# Altium PCB FlightController_Top_6x6.PcbDoc (part 4 of 6)
Units mm, origin at the board's own origin, x right, y up, seen from the top; angles counter-clockwise.
Board outline 149.8 x 149.8 mm, 2 copper layers (Top Layer, Bottom Layer); 156 components, 166 nets, 860 pads, 423 vias.
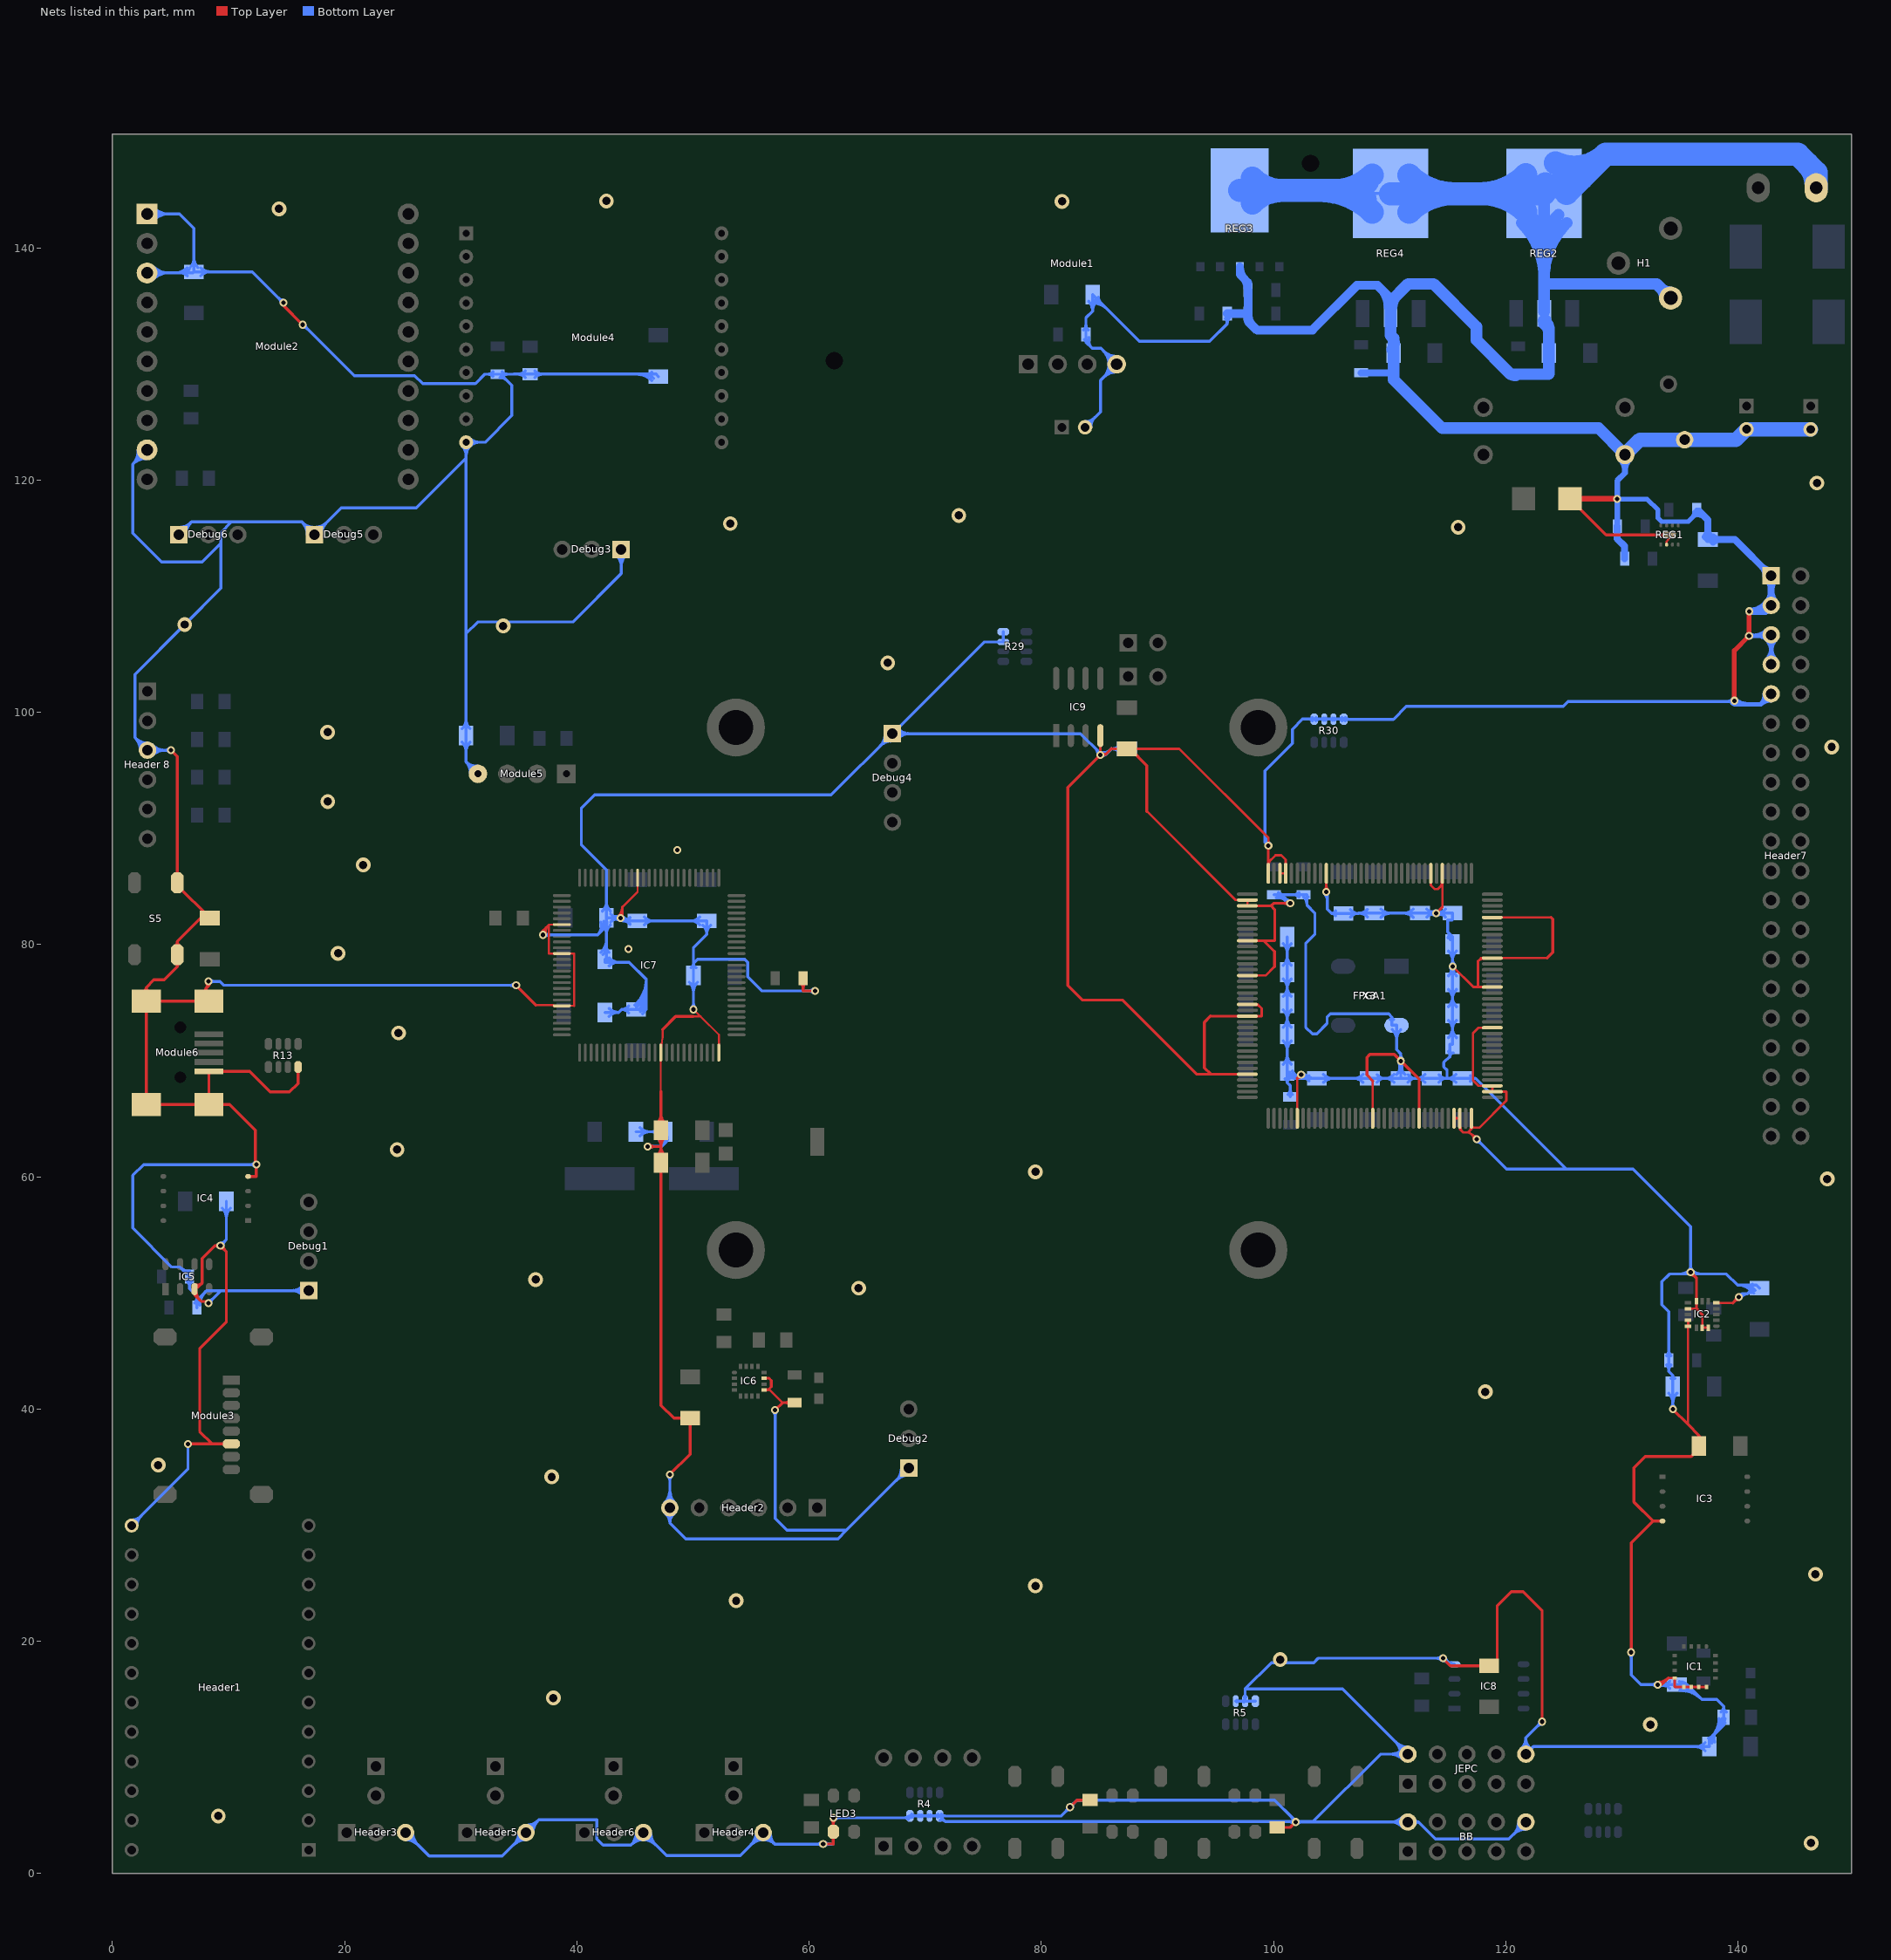
[diagram p4: the nets of this part, all layers, seen from the top]

## Via types
v1: diameter 0.686, hole 0.381, Top Layer to Bottom Layer, 391 vias
v2: diameter 1.27, hole 0.711, Top Layer to Bottom Layer, 32 vias

## Nets (pads, with @x,y where several pads share a name; then routed paths per layer and width w, separated by ;. In a path a pad name is that pad's centre, name@x,y a point inside that pad or via, vN(x,y) a via of type N, cw(c..) or ccw(c..) an arc to the next point about the centre after c; other vN are vias at no path point) (continued)
GND: "Header 8.3" BB.2 BB.10 C2.1 C3.2 C4.2 C5.1 C7.2 C8.2 C9.1 C10.2 C11.2 C12.2 C13.2 C14.2 C15.1 C16.2 C17.2 C18.2 C19.1 C20.2 C21.2 C23.1 C24.2 C25.2 C26.2 C27.2 C28.2 C29.2 C30.2 C31.2 C32.1 C33.1 C34.1 C35.1 C36.2 C37.2 C38.1 C39.2 C40.1 C41.2 C42.2 C43.2 C44.2 C45.2 C46.2 C47.2 C48.2 C49.1 C56.2 C57.2 C58.2 C59.2 C60.2 C61.2 C62.2 C63.2 C64.2 C65.2 C66.2 C67.2 C68.2 C69.2 C70.2 C71.2 C72.2 C73.2 C74.2 C75.2 C76.2 C77.2 C78.1 C79.1 D2.A Debug1.1 Debug2.1 Debug3.1 Debug4.1 Debug5.1 Debug6.1 FPGA1.6 FPGA1.19 FPGA1.27 FPGA1.33 FPGA1.34 FPGA1.36 FPGA1.38 FPGA1.39 FPGA1.49 FPGA1.56 FPGA1.61 FPGA1.68 FPGA1.78 FPGA1.80 FPGA1.98 FPGA1.105 FPGA1.106 FPGA1.108 FPGA1.110 FPGA1.111 FPGA1.117 FPGA1.123 FPGA1.128 FPGA1.130 FPGA1.140 H1.OUT Header1.13 Header2.6 Header3.3 Header4.3 Header5.3 Header6.3 Header7.1 Header7.3 Header7.5 Header7.7 Header7.9 Header9.R IC1.8 IC1.9 IC1.10 IC1.11 IC1.12 IC2.5 IC2.8 IC2.10 IC2.12 IC2.13 IC2.15 IC2.16 IC3.4 IC4.4 IC5.3 IC6.9 IC6.11 IC7.15 IC7.31 IC7.36 IC7.45 IC7.65 IC7.75 IC8.4 IC9.4 JEPC.2 JEPC.10 LED3.1 Module1.4 Module2.1 Module2.3 Module2.9 Module3.6 Module4.10 Module5.4 Module6.1 R3.2 R4.5 R4.6 R4.7 R4.8 R5.6 R5.7 R5.8 R6.2 R7.2 R13.8 R20.1 R29.3 R29.4 R30.5 R30.6 R30.7 R30.8 REG1.2 REG2.2 REG3.3 REG4.2 S5.1 X3.2 | length 2084.7
  Top Layer w0.165: REG1.2@133.862,114.453 133.862,114.727
  Top Layer w0.17: 36.47,74.797 37.969,74.797 38.035,74.731 IC7.45@38.704,74.731 39.772,74.731 ; 37.587,79.232 IC7.36@38.704,79.232 39.772,79.232 ; 37.587,81.731 IC7.31@38.704,81.731 ; 37.799,74.797 cw(c37.799,74.476) IC7.45@38.026,74.703 ; 45.229,84.552 IC7.15@45.229,85.756 ; IC7.65@47.204,71.388 ccw(c46.985,71.665) 47.336,71.624 ; 47.229,67.35 IC7.65@47.229,70.707 47.379,71.992 ; IC7.75@52.229,70.707 52.229,72.233 ; 133.862,114.727 133.985,114.85 REG1.2@133.985,115.062 ; 133.985,114.832 cw(c134.232,114.832) REG1.2@134.168,115.07
  Top Layer w0.175: v1@36.988,80.825 cw(c37.469,80.92) 37.122,81.266 ; 37.081,81.225 37.587,81.731 ; v1@37.16,80.859 cw(c37.858,80.995) 37.355,81.499 ; v1@37.331,80.893 cw(c38.247,81.071) 37.587,81.731 ; 37.587,79.232 37.587,81.731 ; 39.772,74.731 39.772,79.232 ; 43.912,83.235 45.229,84.552 ; 47.379,71.992 47.379,72.689 ; 50.042,73.809 50.654,73.809 ; v1(50.042,74.42) 50.654,73.809 ; 52.229,72.233 50.654,73.809
  Top Layer w0.2: FPGA1.111@97.752,83.344 FPGA1.110@97.752,83.844 ; FPGA1.106@100.552,86.144 FPGA1.105@101.052,86.144 ; FPGA1.33@115.552,65.044 FPGA1.34@116.052,65.044 ; FPGA1.38@118.852,67.344 FPGA1.39@118.852,67.844 ; IC1.9@135.337,16.058 IC1.10@135.987,16.058 IC1.11@136.637,16.058 IC1.12@137.287,16.058 ; IC2.13@135.719,47.144 IC2.12@135.719,47.644 ; IC2.15@136.936,47.01 IC2.16@137.436,47.01
  Top Layer w0.21: IC6.11@56.114,42.65 56.553,42.65 56.739,42.464 ; 56.739,41.905 56.545,41.712 ; C20.2@58.362,40.344 ccw(c57.859,39.841) 57.859,40.553 ccw(c57.859,41.265) C20.2@58.362,40.762 ; C20.2@58.771,40.553 57.704,40.553 56.545,41.712 ; 89.099,91.486 96.741,83.844 FPGA1.110@97.752,83.844 ; 91.89,96.864 99.563,89.19 v1(99.563,88.514) ; 93.376,68.844 94.596,68.844 FPGA1.140@97.752,68.844 ; 94.585,73.844 FPGA1.130@97.752,73.844 98.979,73.844 98.979,74.519 98.654,74.844 FPGA1.128@97.752,74.844 ; FPGA1.123@97.752,77.344 99.335,77.344 100.097,78.106 ; FPGA1.117@97.752,80.344 99.157,80.344 ; FPGA1.111@97.752,83.344 99.792,83.344 ; FPGA1.128@98.502,74.799 cw(c98.502,74.323) 98.839,74.659 ; FPGA1.108@99.552,86.144 99.552,87.081 ; v1@99.552,88.503 99.552,87.081 ; FPGA1.108@99.597,86.894 cw(c100.156,86.894) 99.761,87.289 ; 100.097,79.404 99.157,80.344 ; 100.097,80.344 99.157,80.344 ; FPGA1.105@101.052,86.144 101.052,87.331 100.681,87.702 100.173,87.702 99.552,87.081 ; FPGA1.6@102.052,65.044 102.052,68.474 ; v1@104.384,84.707 ccw(c103.977,85.114) 104.552,85.114 ccw(c105.127,85.114) v1@104.72,84.707 ; v1(104.552,84.539) FPGA1.98@104.552,86.144 ; FPGA1.19@108.552,65.044 108.552,68.271 ; FPGA1.27@112.552,65.044 112.552,68.399 ; FPGA1.80@113.552,86.144 113.552,85.118 113.889,84.781 114.146,84.781 114.552,85.187 ; v1(114.016,82.709) 114.552,83.245 114.552,85.187 ; 114.329,84.964 ccw(c113.899,85.394) FPGA1.78@114.507,85.394 ; FPGA1.78@114.552,86.144 114.552,85.187 ; v1(115.438,78.126) 117.22,76.344 117.623,76.344 ; FPGA1.34@116.052,65.044 116.052,64.105 116.331,63.826 116.773,63.826 ; FPGA1.34@116.097,64.294 ccw(c116.662,64.294) 116.262,63.895 ; 116.842,63.895 ccw(c116.442,64.294) FPGA1.36@117.007,64.294 ; FPGA1.36@117.052,65.044 FPGA1.36@117.052,64.232 ; FPGA1.36@117.084,64.326 ccw(c117.31,64.552) 117.31,64.232 ; v1@117.253,63.246 ccw(c116.679,63.246) 117.085,63.652 ccw(c117.491,64.059) v1@117.491,63.484 ; v1(117.491,63.246) 117.064,63.673 116.773,63.826 ; 117.653,78.613 cw(c118.102,78.164) FPGA1.61@118.102,78.799 ; FPGA1.38@118.852,67.344 120.061,67.344 120.061,66.569 117.724,64.232 FPGA1.36@117.052,64.232 ; FPGA1.39@118.852,67.844 117.648,67.844 117.189,68.304 117.189,72.384 117.648,72.844 FPGA1.49@118.852,72.844 ; FPGA1.56@118.852,76.344 117.623,76.344 ; FPGA1.68@118.852,82.344 123.915,82.344 ; 123.579,78.844 FPGA1.61@118.852,78.844 117.884,78.844 117.623,78.583 117.623,76.344 ; 134.003,16.833 IC1.8@134.562,16.833 134.562,16.058 IC1.9@135.337,16.058 ; 135.708,38.68 135.708,47.144 IC2.13@135.719,47.144 ; IC2.10@135.719,48.644 136.436,48.644 ; 136.436,48.636 136.436,48.644 ; 136.436,51.278 IC2.8@136.436,49.278 136.436,48.644 ; IC2.15@136.936,47.01 136.936,48.136 ; IC2.5@138.153,49.144 139.568,49.144 ; 56.545,41.712 IC6.9@56.114,41.65 56.484,41.65 56.545,41.712 ; 116.773,63.826 117.052,64.105 FPGA1.36@117.052,64.232
  Top Layer w0.254: Module6.1@2.654,75.974 ccw(c2.553,76.311) 2.905,76.311 ; Module6.1@3.156,75.974 cw(c3.257,76.311) 2.905,76.311 ; v1(5.05,96.744) 5.588,96.206 S5.1@5.588,85.344 5.588,85.087 C15.1@8.382,82.293 7.617,82.293 5.588,80.264 ; S5.1@5.361,79.851 ccw(c5.099,80.264) 5.588,80.264 ; S5.1@5.397,78.417 cw(c5.238,78.105) 5.588,78.105 ; S5.1@5.779,78.417 ccw(c5.938,78.105) 5.588,78.105 ; S5.1@5.815,79.851 cw(c6.077,80.264) 5.588,80.264 ; v1(6.5,36.998) 8.587,36.998 ; IC5.3@7.035,50.481 ccw(c7.169,50.837) 7.439,50.568 ; IC5.3@7.124,50.718 ccw(c7.322,51.241) 7.717,50.846 ; IC5.3@7.177,50.475 cw(c7.459,50.193) 7.459,50.592 ; IC5.3@7.177,50.685 ccw(c7.4,50.908) 7.4,50.592 ; IC5.3@7.22,50.08 ccw(c8.178,50.08) 7.5,49.403 ; Module6.1@7.862,75.989 ccw(c7.81,76.221) 8.047,76.221 ; v1@8.082,76.706 cw(c7.785,76.483) 8.047,76.221 ; v1@8.134,76.656 cw(c7.981,76.429) 8.255,76.429 ; Module6.1@8.218,69.001 cw(c8.008,68.791) 8.305,68.791 cw(c8.602,68.791) Module6.1@8.392,69.001 ; Module6.1@8.233,75.993 cw(c8.28,76.221) 8.047,76.221 ; 8.255,76.428 ccw(c8.022,76.661) v1@8.285,76.858 ; v1(8.255,49.114) 8.098,49.271 7.632,49.271 7.072,49.831 IC5.3@7.072,50.33 7.072,50.592 7.463,50.592 7.717,50.846 ; v1(8.255,76.835) 8.255,76.429 ; Module6.1@8.305,75.138 Module6.1@8.047,75.138 ; v1@8.376,76.656 ccw(c8.529,76.429) 8.255,76.429 ; v1@9.138,53.927 ccw(c8.809,53.627) 8.809,54.072 ; v1@9.138,54.217 cw(c8.809,54.517) 8.809,54.072 ; v1@9.298,53.856 cw(c9.298,53.335) 9.667,53.703 cw(c10.035,54.072) v1@9.514,54.072 ; Module3.6@10.239,36.998 8.587,36.998 ; IC4.4@11.681,60.041 12.391,60.041 v1(12.391,61.057) ; v1@12.319,61.057 12.319,64.008 10.089,66.238 Module6.1@8.305,66.238 ; v1(14.727,135.301) 14.727,135.047 v1(16.378,133.396) ; R13.8@15.977,69.455 15.977,68.047 15.24,67.31 13.589,67.31 11.811,69.088 Module6.1@8.305,69.088 Module6.1@8.305,66.238 ; v1(34.767,76.5) 36.47,74.797 ; v1@36.97,81.029 ccw(c36.853,81.225) 37.081,81.225 ; v1(37.081,80.844) 37.081,81.225 ; v1@37.191,81.029 cw(c37.309,81.225) 37.081,81.225 ; v1@43.611,82.448 ccw(c42.884,83.175) 43.912,83.175 ; v1(43.764,82.296) 43.912,82.444 43.912,83.235 ; v1(46.101,62.611) 46.106,62.606 47.248,62.606 ; v1@46.254,62.458 cw(c46.611,62.101) 46.611,62.606 ; v1@46.254,62.764 ccw(c46.634,63.144) 46.634,62.606 ; C34.1@46.896,64.585 ccw(c46.046,65.435) 47.248,65.435 ccw(c48.451,65.435) C34.1@47.6,64.585 ; C34.1@46.902,63.425 cw(c46.109,62.607) 47.248,62.607 ; C35.1@46.904,61.798 ccw(c46.128,62.606) 47.248,62.606 ; 47.229,67.35 47.248,67.331 C34.1@47.248,64.007 47.248,62.606 ; 47.379,72.689 48.498,73.809 50.042,73.809 ; C35.1@47.593,61.798 cw(c48.369,62.606) 47.248,62.606 ; C34.1@47.595,63.425 ccw(c48.388,62.607) 47.248,62.607 ; v1(48.006,34.362) 49.754,36.11 C21.2@49.754,39.216 48.357,39.216 47.248,40.325 C35.1@47.248,61.213 47.248,62.606 ; 56.739,41.905 56.739,42.464 ; v1(57.069,39.918) 57.704,40.553 ; C30.2@59.301,76.695 cw(c58.835,76.229) 59.494,76.229 cw(c60.153,76.229) C30.2@59.687,76.695 ; C30.2@59.494,77.089 59.494,76.03 59.482,76.018 v1(60.507,76.018) ; v1(61.214,2.54) 62.087,2.54 62.092,2.535 LED3.1@62.092,3.594 v1(62.092,4.796) ; v1@61.939,4.643 cw(c61.571,4.275) 62.092,4.275 cw(c62.613,4.275) v1@62.245,4.643 ; v1(82.478,5.715) 83.081,6.318 R6.2@84.201,6.318 ; IC9.4@85.09,98.004 v1@85.09,96.393 ; v1@85.243,96.495 ccw(c85.489,96.741) 85.489,96.393 ; v1@85.273,96.227 cw(c85.573,96.039) 85.573,96.393 ; 89.099,91.486 89.099,95.432 C78.1@87.667,96.864 ; 91.89,96.864 C78.1@87.667,96.864 ; 93.376,68.844 86.989,75.23 83.536,75.23 82.291,76.475 82.291,93.544 v1(85.09,96.342) v1@85.09,96.393 ; 94.585,73.844 94.052,73.311 94.052,69.388 94.596,68.844 ; v1@99.552,88.503 v1(99.563,88.514) ; 100.097,78.106 100.097,79.404 ; 100.097,80.344 100.109,80.357 100.109,83.027 99.792,83.344 100.009,83.561 v1(101.443,83.561) ; R7.2@100.33,3.968 101.443,3.968 v1(101.907,4.432) ; v1@101.29,83.409 ccw(c100.922,83.04) 100.922,83.561 ccw(c100.922,84.083) v1@101.29,83.714 ; v1@102.167,68.786 cw(c101.771,68.754) 102.052,68.474 ; v1@102.365,68.589 ccw(c102.332,68.193) 102.052,68.474 ; v1(102.382,68.804) 102.052,68.474 ; 108.552,68.271 108.047,68.776 108.047,70.293 108.301,70.547 110.404,70.547 v1(110.968,69.983) 112.552,68.399 ; v1(114.6,18.537) 115.246,17.891 C64.2@118.564,17.891 119.274,17.891 119.274,23.059 120.493,24.278 121.509,24.278 123.135,22.652 v1(123.135,13.076) ; 123.579,78.844 124.073,79.338 124.073,82.186 123.915,82.344 ; D2.A@125.541,118.394 128.657,115.278 REG1.2@134.112,115.278 ; v1(130.81,19.05) 130.81,28.478 132.685,30.353 ; v1@133.095,16.221 ccw(c133.114,16.889) 133.587,16.416 ; v1(133.096,16.259) 133.429,16.259 134.003,16.833 cw(c133.138,17.699) v1@133.102,16.475 ; IC3.4@133.51,30.353 132.685,30.353 ; REG1.2@133.69,115.156 ccw(c133.394,114.86) 133.394,115.278 ccw(c133.394,115.696) REG1.2@133.69,115.4 ; v1(134.399,39.988) 135.708,38.68 136.652,37.735 ; v1@135.928,51.57 cw(c135.928,51.049) 136.297,51.417 cw(c136.665,51.786) v1@136.144,51.786 ; v1(135.928,51.786) 136.436,51.278 ; 136.436,48.636 136.936,48.136 ; C8.2@136.502,37.529 ccw(c136.435,37.735) 136.652,37.735 ; C8.2@136.803,37.531 cw(c136.866,37.735) 136.652,37.735 ; 139.568,49.144 v1(140.076,49.652) ; v1@139.86,49.652 cw(c139.339,49.652) 139.708,49.284 cw(c140.076,48.915) v1@140.076,49.436 ; v1(140.965,106.599) v1@140.97,106.604 ; Module6.1@2.905,75.138 2.905,76.311 ; Module6.1@2.905,75.138 Module6.1@8.047,75.138 ; Module6.1@2.905,75.138 Module6.1@2.905,66.238 Module6.1@8.305,66.238 ; 2.905,76.311 3.556,76.962 4.445,76.962 5.588,78.105 ; 5.588,78.105 S5.1@5.588,79.144 5.588,80.264 ; 7.717,50.846 7.717,52.98 8.809,54.072 ; Module6.1@8.047,75.138 8.047,76.221 ; 8.047,76.221 8.255,76.429 ; 8.587,36.998 7.514,38.071 7.514,45.196 9.806,47.488 9.806,53.564 v1(9.298,54.072) 8.809,54.072 ; v1@85.09,96.393 85.573,96.393 ; 85.573,96.393 86.051,96.871 86.058,96.864 C78.1@87.376,96.864 C78.1@87.667,96.864 ; 132.685,30.353 131.047,31.991 131.047,34.926 132.032,35.911 135.987,35.911 136.655,36.579 C8.2@136.655,36.83 136.655,37.335 136.652,37.338 136.652,37.735
  Top Layer w0.4: v1@139.594,101.112 ccw(c139.35,101.356) 139.695,101.356 ccw(c140.041,101.356) v1@139.797,101.112 ; v1(139.695,101.011) 139.695,105.329 v1(140.965,106.599) ; v1@140.822,106.599 cw(c140.477,106.599) 140.721,106.355 cw(c140.965,106.111) v1@140.965,106.456 ; v1@140.864,106.7 ccw(c140.609,106.956) 140.97,106.956 ; v1@140.869,108.611 cw(c140.625,108.367) 140.97,108.367 cw(c141.315,108.367) v1@141.071,108.611 ; v1@140.97,106.604 v1(140.97,108.712)
  Top Layer w0.5: D2.A@125.541,118.394 v1(129.61,118.394)
  Bottom Layer w0.254: Header1.13@1.651,29.972 6.5,34.821 v1(6.5,36.998) ; Header1.13@1.651,30.445 ccw(c1.651,31.587) 2.458,30.779 ccw(c3.266,29.972) Header1.13@2.124,29.972 ; Module2.9@2.209,122.574 cw(c0.65,122.492) 1.754,121.388 ; 2.395,96.744 ccw(c0.891,96.744) 1.954,97.808 ccw(c3.018,98.871) 3.018,97.367 ; Module2.9@2.463,122.588 cw(c1.416,122.532) 2.157,121.791 cw(c2.898,121.05) Module2.9@2.954,122.097 ; 2.649,96.744 ccw(c1.758,96.744) 2.388,97.374 ccw(c3.018,98.004) 3.018,97.113 ; Module2.9@2.94,121.843 ccw(c2.858,120.284) 1.754,121.388 ; Module2.9@2.981,122.615 1.754,121.388 ; Module2.3@2.981,137.855 6.921,137.855 C12.2@7.015,137.949 ; Module2.1@2.981,142.935 5.782,142.935 7.015,141.702 C12.2@7.015,137.949 ; 3.279,96.483 cw(c3.909,95.853) 3.909,96.744 cw(c3.909,97.635) 3.279,97.005 ; Module2.3@3.348,137.488 cw(c4.234,136.602) 4.234,137.855 cw(c4.234,139.108) Module2.3@3.348,138.222 ; Module2.1@3.348,142.568 cw(c4.234,141.682) 4.234,142.935 cw(c4.234,144.188) Module2.1@3.348,143.302 ; 3.459,96.303 cw(c4.522,95.24) 4.522,96.744 cw(c4.522,98.248) 3.459,97.185 ; Module2.3@3.528,137.308 cw(c4.847,135.989) 4.847,137.855 cw(c4.847,139.721) Module2.3@3.528,138.402 ; Module2.1@3.528,142.388 cw(c4.847,141.069) 4.847,142.935 cw(c4.847,144.801) Module2.1@3.528,143.482 ; v1@4.897,96.591 ccw(c4.529,96.223) 4.529,96.744 ccw(c4.529,97.265) v1@4.897,96.897 ; v1(5.05,96.744) 3.018,96.744 1.926,97.836 1.926,103.272 v2(6.223,107.569) 9.343,110.689 9.343,114.575 ; 5.361,137.855 ccw(c5.361,139.378) C12.2@6.438,138.301 ; Debug6.1@5.715,115.316 6.803,116.404 10.257,116.404 ; Debug6.1@5.715,115.685 ccw(c5.715,116.576) 6.345,115.946 ccw(c6.975,115.316) Debug6.1@6.084,115.316 ; Debug6.1@5.715,115.939 ccw(c5.715,117.443) 6.778,116.38 ccw(c7.842,115.316) Debug6.1@6.338,115.316 ; 5.815,137.855 cw(c5.815,136.974) C12.2@6.438,137.597 ; 5.824,52.212 ccw(c6.631,53.02) C16.2@6.631,51.878 ; 5.974,137.855 ccw(c5.974,138.765) C12.2@6.617,138.122 ; C16.2@6.257,51.779 ccw(c6.631,52.153) C16.2@6.631,51.624 ; C16.2@6.438,51.012 cw(c5.972,50.546) 6.631,50.546 cw(c7.29,50.546) C16.2@6.824,51.012 ; C12.2@6.663,138.301 ccw(c5.813,139.151) 7.015,139.151 ccw(c8.217,139.151) C12.2@7.367,138.301 ; C14.2@7.073,49.131 ccw(c6.607,49.597) 7.266,49.597 ccw(c7.925,49.597) C14.2@7.459,49.131 ; C14.2@7.266,48.738 7.266,49.373 ; C14.2@7.285,48.938 cw(c8.381,48.938) 7.606,49.713 ; C14.2@7.539,48.938 cw(c9.248,48.938) 8.04,50.147 ; C12.2@7.592,137.597 cw(c8.442,136.747) 8.442,137.949 cw(c8.442,139.151) C12.2@7.592,138.301 ; v1(8.255,49.114) 9.342,50.202 ; v1@8.255,49.33 ccw(c8.255,49.852) 8.624,49.483 ccw(c8.992,49.114) v1@8.471,49.114 ; v1(8.255,76.835) 9.271,76.835 9.606,76.5 v1(34.767,76.5) ; v1@8.408,76.682 cw(c8.776,76.314) 8.776,76.835 cw(c8.776,77.356) v1@8.408,76.988 ; v1(9.298,54.072) 9.806,54.58 C13.2@9.806,57.882 ; v1@9.298,54.288 ccw(c9.298,54.809) 9.667,54.441 ccw(c10.035,54.072) v1@9.514,54.072 ; C13.2@9.454,57.305 cw(c8.604,56.455) 9.806,56.455 cw(c11.008,56.455) C13.2@10.158,57.305 ; v1@12.238,60.904 ccw(c11.869,60.536) 11.869,61.057 ccw(c11.869,61.578) v1@12.238,61.21 ; v1(12.391,61.057) 2.688,61.057 1.761,60.13 1.761,55.583 5.11,52.234 5.802,52.234 C16.2@6.631,51.405 6.631,50.389 7.266,49.754 7.266,49.373 ; 14.288,135.699 ccw(c14.727,136.139) v1@14.727,135.517 ; 14.388,135.599 cw(c14.09,135.301) v1@14.511,135.301 ; v1@14.732,135.255 14.707,135.28 12.038,137.949 C12.2@7.015,137.949 ; v1@16.378,133.18 cw(c16.378,132.509) 16.853,132.984 ; v1@16.415,133.422 20.835,129.002 26.03,129.002 26.716,128.316 31.26,128.316 32.076,129.132 C18.2@33.177,129.132 C18.2@33.428,129.132 ; Debug1.1@16.456,49.761 ccw(c15.393,48.697) 15.393,50.202 ccw(c15.393,51.706) Debug1.1@16.456,50.642 ; v1@16.594,133.396 ccw(c16.966,133.396) 16.703,133.133 ; Debug1.1@16.636,49.941 ccw(c16.006,49.311) 16.006,50.202 ccw(c16.006,51.092) Debug1.1@16.636,50.462 ; Debug5.1@16.776,115.316 ccw(c15.272,115.316) 16.335,116.38 ccw(c17.399,117.443) 17.399,115.939 ccw(c17.399,117.443) 18.462,116.38 ccw(c19.526,115.316) Debug5.1@18.022,115.316 ; Debug1.1@16.897,50.202 9.342,50.202 ; Debug5.1@17.03,115.316 ccw(c16.139,115.316) 16.769,115.946 ccw(c17.399,116.576) 17.399,115.685 ccw(c17.399,116.576) 18.029,115.946 ccw(c18.659,115.316) Debug5.1@17.768,115.316 ; Header3.3@25.243,2.903 cw(c25.243,1.399) 26.307,2.462 cw(c27.37,3.526) Header3.3@25.866,3.526 ; Header3.3@25.243,3.157 cw(c25.243,2.266) 25.873,2.896 cw(c26.503,3.526) Header3.3@25.612,3.526 ; Header3.3@25.243,3.526 27.275,1.494 33.583,1.494 Header5.3@35.615,3.526 36.707,4.618 41.729,4.618 41.729,2.981 42.261,2.449 44.655,2.449 Header6.3@45.732,3.526 47.714,1.545 54.068,1.545 Header4.3@56.049,3.526 57.04,2.535 ; C17.2@30.101,97.437 cw(c29.251,96.587) 30.453,96.587 cw(c31.655,96.587) C17.2@30.805,97.437 ; C17.2@30.101,98.591 ccw(c29.251,99.441) 30.453,99.441 ccw(c31.655,99.441) 30.805,98.591 cw(c31.656,99.439) 30.454,99.441 ; C17.2@30.101,98.591 ccw(c29.251,99.443) 30.454,99.442 ; Module4.10@30.128,122.933 cw(c29.32,122.125) 30.462,122.125 cw(c31.604,122.125) 30.796,122.933 cw(c31.604,122.125) 31.604,123.267 cw(c31.604,124.409) Module4.10@30.796,123.601 ; Module5.4@30.805,94.769 ccw(c29.592,94.873) 30.453,95.735 ccw(c31.315,96.596) Module5.4@31.419,95.383 ; Module5.4@31.059,94.748 ccw(c30.303,94.813) 30.839,95.349 ccw(c31.376,95.885) Module5.4@31.44,95.129 ; Module5.4@31.476,94.712 30.453,95.735 C17.2@30.453,98.014 ; C18.2@32.784,128.939 ccw(c32.318,128.473) 32.318,129.132 ccw(c32.318,129.791) C18.2@32.784,129.325 ; C18.2@33.377,128.859 cw(c33.377,128.077) 33.93,128.63 ; C18.2@33.57,128.939 cw(c34.036,128.473) 34.036,129.132 cw(c34.036,129.791) C18.2@33.57,129.325 ; C18.2@33.65,129.132 ccw(c34.186,129.132) 33.807,128.753 ; v1@34.614,76.347 ccw(c34.245,75.979) 34.245,76.5 ccw(c34.245,77.022) v1@34.614,76.653 ; Header5.3@34.992,3.526 cw(c33.488,3.526) 34.551,2.462 cw(c35.615,1.399) Header5.3@35.615,2.903 ; Header5.3@35.246,3.526 cw(c34.355,3.526) 34.985,2.896 cw(c35.615,2.266) Header5.3@35.615,3.157 ; C19.1@35.565,128.855 ccw(c34.885,128.175) 34.885,129.136 ccw(c34.885,130.097) C19.1@35.565,129.417 ; Header5.3@35.615,3.895 ccw(c35.615,4.786) 36.245,4.156 ccw(c36.874,3.526) Header5.3@35.984,3.526 ; Header5.3@35.615,4.149 ccw(c35.615,5.653) 36.678,4.59 ccw(c37.742,3.526) Header5.3@36.238,3.526 ; C19.1@36.377,128.855 cw(c37.057,128.175) 37.057,129.136 cw(c37.057,130.097) C19.1@36.377,129.417 ; v1(37.081,80.844) 41.785,80.844 ; v1@37.233,80.691 cw(c37.602,80.322) 37.602,80.844 cw(c37.602,81.365) v1@37.233,80.996 ; C24.2@42.064,79.317 ccw(c40.907,80.473) 42.543,80.473 ; C31.2@42.065,81.932 cw(c41.004,81.625) 41.785,80.844 ; 42.089,81.148 ccw(c41.476,81.761) C31.2@42.309,82.003 ; C31.2@42.191,81.718 cw(c41.341,80.868) 42.543,80.868 cw(c43.746,80.868) C31.2@42.895,81.718 ; C31.2@42.191,82.873 ccw(c41.341,83.723) 42.543,83.723 ccw(c43.746,83.723) C31.2@42.895,82.873 ; C24.2@42.244,79.137 ccw(c41.521,79.86) 42.543,79.86 ccw(c43.312,79.86) C24.2@42.768,79.317 ; C31.2@42.393,81.452 ccw(c41.947,81.898) C31.2@42.553,82.073 ; C25.2@42.416,74.168 43.607,74.168 ; C24.2@42.416,78.74 42.416,78.486 44.504,78.486 45.982,77.008 ; C24.2@42.543,78.74 C31.2@42.543,81.602 ; C24.2@42.589,78.687 ccw(c43.074,79.172) 43.074,78.486 ; C24.2@42.768,78.162 cw(c43.55,77.381) 43.55,78.486 ; C24.2@42.768,78.867 ccw(c43.687,79.786) 43.687,78.486 ; C25.2@42.771,73.818 cw(c43.607,72.993) 43.607,74.168 ; C25.2@42.771,74.517 ccw(c43.607,75.342) 43.607,74.168 ; C31.2@42.898,81.946 cw(c43.734,81.121) v1@43.734,82.296 ; C31.2@42.898,82.645 ccw(c43.734,83.47) v1@43.734,82.296 ; 43.24,82.163 cw(c43.382,81.634) v1@43.656,82.108 ; 43.24,82.428 ccw(c43.382,82.957) v1@43.656,82.483 ; 43.276,82.173 ccw(c43.148,82.651) v1@43.577,82.404 ; 43.276,82.418 cw(c43.148,81.94) v1@43.577,82.188 ; Debug3.1@43.374,113.605 cw(c42.311,112.542) 43.815,112.542 cw(c45.319,112.542) Debug3.1@44.256,113.605 ; Debug3.1@43.554,113.785 cw(c42.924,113.155) 43.815,113.155 cw(c44.706,113.155) Debug3.1@44.076,113.785 ; v1@43.611,82.143 ccw(c43.242,81.774) 43.242,82.296 ccw(c43.242,82.817) v1@43.611,82.448 ; v1@43.731,82.277 ccw(c44.199,82.547) 44.059,82.025 ; v1@43.737,82.269 ccw(c44.278,82.81) 44.278,82.045 ; Debug3.1@43.815,114.046 43.815,111.963 39.645,107.793 31.469,107.793 30.462,106.786 ; v1@43.912,82.444 v1(43.764,82.296) v1@43.734,82.296 ; v1@43.916,82.448 ccw(c44.891,83.423) C28.2@44.891,82.045 ; C27.2@44.465,74.117 ccw(c43.858,73.657) 43.858,74.419 ; C27.2@44.465,74.72 cw(c43.858,75.18) 43.858,74.419 ; C28.2@44.592,81.743 ccw(c43.985,81.283) v1@43.985,82.045 ; C28.2@44.592,82.346 cw(c43.985,82.806) v1@43.985,82.045 ; C27.2@44.982,74.792 ccw(c43.027,77.008) 45.982,77.008 ; C32.1@45.083,63.881 C33.1@47.629,63.881 47.629,62.937 ; Header6.3@45.109,3.526 cw(c43.605,3.526) 44.669,2.462 cw(c45.732,1.399) 45.732,2.903 cw(c45.732,1.399) 46.796,2.462 cw(c47.859,3.526) Header6.3@46.355,3.526 ; 45.115,129.136 cw(c45.115,127.258) C23.1@46.443,128.586 ; C27.2@45.15,74.602 ccw(c43.524,76.445) 45.982,76.445 ; C27.2@45.318,74.411 ccw(c44.02,75.883) 45.982,75.883 ; Header6.3@45.363,3.526 cw(c44.472,3.526) 45.102,2.896 cw(c45.732,2.266) 45.732,3.157 cw(c45.732,2.266) 46.362,2.896 cw(c46.992,3.526) Header6.3@46.101,3.526 ; C32.1@45.435,63.528 cw(c46.286,62.678) 46.286,63.881 cw(c46.286,65.083) C32.1@45.435,64.233 ; C27.2@45.486,74.221 ccw(c44.516,75.32) 45.982,75.32 ; C27.2@45.654,74.03 ccw(c45.013,74.757) 45.982,74.757 ; 45.728,129.136 cw(c45.728,127.871) C23.1@46.622,128.765 ; C27.2@45.788,74.274 cw(c45.982,74.216) 45.982,74.419 ; C27.2@45.788,74.563 ccw(c45.982,74.621) 45.982,74.419 ; C28.2@45.79,81.692 cw(c46.641,80.842) 46.641,82.045 cw(c46.641,83.247) C28.2@45.79,82.397 ; 46.071,129.136 ccw(c46.071,129.662) C23.1@46.443,129.29 ; v1(46.101,62.611) 47.193,62.611 47.248,62.556 ; v1@46.254,62.458 cw(c46.622,62.09) 46.622,62.611 cw(c46.622,63.132) v1@46.254,62.764 ; C23.1@47.02,128.938 46.822,129.136 C19.1@35.971,129.136 34.569,129.136 34.565,129.132 C18.2@33.428,129.132 ; C33.1@47.263,63.318 cw(c46.859,62.945) 47.248,62.556 ; C33.1@47.277,63.528 ccw(c46.427,62.678) 46.427,63.881 ccw(c46.427,65.083) C33.1@47.277,64.233 ; 47.435,62.743 ccw(c47.054,63.124) C33.1@47.45,63.49 ; C33.1@47.454,63.189 cw(c47.36,62.937) 47.629,62.937 ; Header2.6@47.565,31.937 ccw(c46.502,33) 48.006,33 ccw(c49.51,33) Header2.6@48.447,31.937 ; Header2.6@47.614,31.012 cw(c46.952,30.191) 48.006,30.191 ; 47.622,62.929 ccw(c47.248,63.303) C33.1@47.637,63.662 ; Header2.6@47.745,31.757 ccw(c47.115,32.387) 48.006,32.387 ccw(c48.897,32.387) Header2.6@48.267,31.757 ; Header2.6@47.774,31.209 cw(c47.381,30.723) 48.006,30.723 cw(c48.631,30.723) Header2.6@48.238,31.209 ; C33.1@47.804,63.189 ccw(c47.899,62.937) 47.629,62.937 ; v1@47.853,34.209 cw(c47.485,33.84) 48.006,33.84 cw(c48.527,33.84) v1@48.159,34.209 ; v1(48.006,34.362) Header2.6@48.006,31.496 48.006,30.191 ; Header2.6@48.398,31.012 ccw(c49.06,30.191) 48.006,30.191 ; C29.2@49.69,76.765 cw(c48.84,75.915) 50.042,75.915 cw(c51.245,75.915) C29.2@50.394,76.765 ; C29.2@49.812,78.009 ccw(c49.614,78.389) 50.042,78.389 ; v1@49.89,74.573 ccw(c49.521,74.941) 50.042,74.941 ccw(c50.564,74.941) v1@50.195,74.573 ; v1(50.042,74.42) C29.2@50.042,77.343 50.042,78.389 ; C29.2@50.273,78.009 cw(c50.47,78.389) 50.042,78.389 ; C26.2@50.605,81.692 ccw(c49.755,80.842) 49.755,82.045 ccw(c49.755,83.247) C26.2@50.605,82.397 ; C26.2@50.841,81.682 cw(c50.096,80.891) 51.182,80.891 ; C26.2@51.524,81.682 ccw(c52.268,80.891) 51.182,80.891 ; Header4.3@55.426,3.526 cw(c53.922,3.526) 54.986,2.462 cw(c56.049,1.399) Header4.3@56.049,2.903 ; Header4.3@55.68,3.526 cw(c54.789,3.526) 55.419,2.896 cw(c56.049,2.266) Header4.3@56.049,3.157 ; Header4.3@56.068,3.157 cw(c56.107,2.41) 56.636,2.939 cw(c57.165,3.468) Header4.3@56.418,3.507 ; Header4.3@56.081,2.904 cw(c56.146,1.642) 57.04,2.535 ; Header4.3@56.672,3.494 ccw(c57.933,3.429) 57.04,2.535 ; v1@56.916,39.765 cw(c56.548,39.397) 57.069,39.397 cw(c57.591,39.397) v1@57.222,39.765 ; v1(57.069,39.918) 57.069,30.577 58.085,29.561 63.216,29.561 ; v1@60.355,75.865 ccw(c59.986,75.496) 59.986,76.018 ccw(c59.986,76.539) v1@60.355,76.17 ; v1(60.507,76.018) 55.926,76.018 54.72,77.223 54.72,78.468 54.453,78.735 50.389,78.735 50.042,78.389 ; 60.681,2.535 ccw(c60.681,3.073) v1@61.061,2.693 ; 60.704,2.535 cw(c60.704,2.03) v1@61.061,2.387 ; v1(61.214,2.54) 62.087,2.54 62.092,2.535 57.04,2.535 ; 61.724,2.535 ccw(c61.724,2.03) 61.367,2.387 cw(c61.735,2.019) 61.735,2.54 cw(c61.735,3.061) 61.367,2.693 ccw(c61.747,3.073) 61.747,2.535 ; v1(62.092,4.796) 68.702,4.796 R4.8@68.702,4.969 R4.7@69.577,4.969 R4.6@70.377,4.969 R4.5@71.252,4.969 R4.5@71.252,4.948 ; v1@62.245,4.643 cw(c62.613,4.275) 62.613,4.796 cw(c62.613,5.317) v1@62.245,4.949 ; Debug4.1@66.56,98.171 cw(c65.056,98.171) 66.119,97.107 cw(c67.183,96.044) Debug4.1@67.183,97.548 ; Debug4.1@66.814,98.171 cw(c65.923,98.171) 66.553,97.541 cw(c67.183,96.911) Debug4.1@67.183,97.802 ; Debug4.1@67.444,97.91 cw(c68.074,97.28) 68.074,98.171 cw(c68.074,99.062) Debug4.1@67.444,98.432 ; Debug4.1@67.624,97.73 cw(c68.687,96.667) 68.687,98.171 cw(c68.687,99.675) Debug4.1@67.624,98.612 ; Debug2.1@67.957,34.925 cw(c66.453,34.925) 67.516,33.861 cw(c68.58,32.798) Debug2.1@68.58,34.302 ; Debug2.1@68.211,34.925 cw(c67.32,34.925) 67.95,34.295 cw(c68.58,33.665) Debug2.1@68.58,34.556 ; 68.219,4.796 cw(c68.219,4.311) R4.8@68.562,4.654 ; 68.229,4.796 ccw(c68.229,5.267) R4.8@68.562,4.934 ; Debug2.1@68.58,34.925 63.216,29.561 ; R4.8@68.842,4.829 cw(c69.18,4.491) 69.18,4.969 cw(c69.18,5.447) R4.8@68.842,5.109 ; R4.7@69.49,4.882 ccw(c69.28,4.672) 69.28,4.969 ccw(c69.28,5.266) R4.7@69.49,5.056 ; R4.7@69.664,4.882 cw(c69.874,4.672) 69.874,4.969 cw(c69.874,5.266) R4.7@69.664,5.056 ; R4.6@70.29,4.882 ccw(c70.08,4.672) 70.08,4.969 ccw(c70.08,5.266) R4.6@70.29,5.056 ; R4.6@70.464,4.882 cw(c70.674,4.672) 70.674,4.969 cw(c70.674,5.266) R4.6@70.464,5.056 ; R4.5@71.112,4.829 ccw(c70.774,4.491) 70.774,4.969 ccw(c70.774,5.447) R4.5@71.112,5.109 ; R4.5@71.291,4.6 cw(c71.388,4.119) 71.735,4.466 ; R4.5@71.392,4.829 cw(c71.68,4.541) 71.68,4.948 ; R4.5@71.392,5.109 ccw(c71.78,5.497) 71.78,4.948 ; R29.4@76.724,106.939 R29.3@76.724,106.064 75.076,106.064 Debug4.1@67.183,98.171 ; v1@82.262,5.715 cw(c81.74,5.715) 82.109,5.346 cw(c82.478,4.978) v1@82.478,5.499 ; v1@82.478,5.931 ccw(c82.478,6.452) 82.846,6.084 ccw(c83.215,5.715) v1@82.694,5.715 ; C11.2@83.654,132.951 ccw(c83.188,133.417) 83.847,133.417 ccw(c84.506,133.417) C11.2@84.04,132.951 ; C11.2@83.716,132.118 cw(c83.595,131.898) 83.847,131.898 ; C10.2@83.774,124.557 85.111,125.894 85.111,128.606 Module1.4@86.499,129.994 85.129,131.364 84.38,131.364 ; C10.2@83.774,125.055 ccw(c83.774,126.257) 84.624,125.407 ccw(c85.474,124.557) C10.2@84.272,124.557 ; C11.2@83.866,132.354 ccw(c84.561,132.193) 84.056,131.688 ; C11.2@83.978,132.118 ccw(c84.099,131.898) 83.847,131.898 ; C9.1@84.07,135.41 cw(c83.22,134.56) 84.422,134.56 cw(c85.624,134.56) C9.1@84.774,135.41 ; C11.2@84.113,132.297 ccw(c85.088,132.072) 84.38,131.364 ; C9.1@84.422,135.264 cw(c84.422,133.519) 85.656,134.753 ; C9.1@84.422,135.518 cw(c84.422,134.386) 85.223,135.186 ; 84.653,96.93 cw(c84.062,96.373) v1@84.874,96.349 ; C9.1@84.92,135.762 ccw(c85.579,135.762) 85.113,135.296 ; v1@85.084,96.305 ccw(c85.191,97.018) 85.701,96.508 ; v1@85.09,96.52 v1@85.09,96.466 ; v1@85.122,96.556 ccw(c85.284,97.637) 86.058,96.864 ; v1@85.26,96.208 cw(c85.536,95.99) 85.536,96.342 ; v1@85.26,96.476 ccw(c85.536,96.694) 85.536,96.342 ; v1@85.279,96.266 v1@85.207,96.342 ; 86.051,96.871 86.058,96.864 ; Module1.4@86.499,129.321 ccw(c86.499,127.696) 85.35,128.845 ccw(c84.201,129.994) 85.826,129.994 ccw(c84.201,129.994) 85.35,131.143 ccw(c86.499,132.292) Module1.4@86.499,130.667 ; Module1.4@86.499,129.575 ccw(c86.499,128.563) 85.784,129.279 ccw(c85.068,129.994) 86.08,129.994 ccw(c85.068,129.994) 85.784,130.709 ccw(c86.499,131.425) Module1.4@86.499,130.413 ; C79.1@86.775,96.537 ccw(c86.058,95.913) 86.058,96.864 ccw(c86.058,97.815) C79.1@86.775,97.191 ; C79.1@87.376,96.864 86.058,96.864 ; C46.2@95.826,133.942 cw(c95.374,133.483) 96.018,133.483 ; C46.2@96.018,134.336 96.018,133.483 ; C46.2@96.21,133.942 ccw(c96.662,133.483) 96.018,133.483 ; R5.6@96.755,14.843 R5.7@97.555,14.843 ; R5.6@96.842,14.756 cw(c97.052,14.546) 97.052,14.843 cw(c97.052,15.14) R5.6@96.842,14.93 ; REG3.3@97.104,144.953 REG3.3@97.104,144.955 ; R5.7@97.468,14.756 ccw(c97.258,14.546) 97.258,14.843 ccw(c97.258,15.14) R5.7@97.468,14.93 ; R5.7@97.468,15.18 ccw(c97.258,15.39) 97.555,15.39 ccw(c97.852,15.39) R5.7@97.642,15.18 ; R5.8@98.43,14.843 R5.7@97.555,14.843 ; 99.273,89.125 ccw(c100.174,89.125) v1@99.537,88.488 ; 99.273,89.738 ccw(c100.787,89.738) v1@99.716,88.667 ; v1(99.563,88.514) 99.273,88.805 99.273,94.98 101.62,97.327 101.62,98.546 102.51,99.436 103.5,99.436 R30.5@103.5,99.425 R30.6@104.375,99.425 R30.7@105.175,99.425 R30.8@106.05,99.425 106.05,99.411 110.333,99.411 111.438,100.516 124.958,100.516 125.383,100.94 v1@139.725,100.94 ; C77.2@100.047,84.3 100.704,84.3 ; C77.2@100.248,84.281 cw(c100.287,83.229) 101.031,83.973 ; C77.2@100.257,84.027 cw(c100.316,82.434) v1(101.443,83.561) 100.704,84.3 ; C77.2@100.44,84.107 cw(c100.906,83.641) 100.906,84.3 cw(c100.906,84.959) C77.2@100.44,84.493 ; C71.2@100.835,69.694 ccw(c99.985,70.544) 101.187,70.544 ccw(c102.389,70.544) C71.2@101.539,69.694 ; C65.2@100.835,71.715 cw(c99.985,70.865) 101.187,70.865 cw(c102.389,70.865) C65.2@101.539,71.715 ; C65.2@100.835,72.869 ccw(c99.985,73.719) 101.187,73.719 ccw(c102.389,73.719) C65.2@101.539,72.869 ; C75.2@100.835,74.382 cw(c99.985,73.532) 101.187,73.532 cw(c102.389,73.532) C75.2@101.539,74.382 ; C75.2@100.835,75.536 ccw(c99.985,76.386) 101.187,76.386 ccw(c102.389,76.386) C75.2@101.539,75.536 ; C56.2@100.835,77.049 cw(c99.985,76.199) 101.187,76.199 cw(c102.389,76.199) C56.2@101.539,77.049 ; C56.2@100.835,78.203 ccw(c99.985,79.053) 101.187,79.053 ccw(c102.389,79.053) C56.2@101.539,78.203 ; C63.2@100.835,80.097 cw(c99.985,79.247) 101.187,79.247 cw(c102.389,79.247) C63.2@101.539,80.097 ; C71.2@100.982,68.438 cw(c100.839,68.121) 101.187,68.121 ; C71.2@101.178,68.887 ccw(c101.859,69.252) 101.859,68.479 ; C63.2@101.187,80.674 101.187,79.142 C56.2@101.187,77.626 101.187,75.925 ; v1@101.227,83.561 ccw(c100.706,83.561) 101.074,83.93 ccw(c101.443,84.299) v1@101.443,83.777 ; v1@101.234,83.505 ccw(c100.731,83.371) 100.991,83.822 ccw(c101.252,84.274) v1@101.387,83.77 ; C73.2@101.251,67.081 ccw(c100.785,67.547) 101.444,67.547 ccw(c102.103,67.547) C73.2@101.637,67.081 ; 101.305,4.466 cw(c101.305,3.83) v1@101.754,4.28 ; C75.2@101.375,75.645 cw(c101.489,75.925) 101.187,75.925 ; C75.2@101.375,75.645 cw(c101.489,75.925) 101.187,75.925 ; C71.2@101.392,68.438 ccw(c101.534,68.121) 101.187,68.121 ; C71.2@101.402,69.007 ccw(c102.283,69.478) v1@102.283,68.479 ; C73.2@101.444,66.888 101.444,67.864 101.187,68.121 ; 101.466,4.466 ccw(c101.466,4.873) v1@101.754,4.585 ; 101.477,4.949 cw(c100.96,4.432) v1@101.691,4.432 ; C71.2@101.493,68.499 cw(c101.648,68.302) 101.825,68.479 ; C71.2@101.626,69.127 ccw(c102.707,69.705) 102.707,68.479 ; C71.2@101.684,68.857 ccw(c102.169,68.823) 101.825,68.479 ; 101.686,4.74 ccw(c101.907,4.961) v1@101.907,4.648 ; v1(101.907,4.432) BB.2@111.579,4.432 112.503,4.432 ; 102.087,68.479 ccw(c102.087,68.813) v1@102.42,68.803 ; v1@102.166,68.81 cw(c101.825,68.82) 101.825,68.479 ; C69.2@102.194,84.107 ccw(c101.728,83.641) 101.728,84.3 ccw(c101.728,84.959) C69.2@102.194,84.493 ; 102.348,4.466 cw(c102.348,4.873) 102.06,4.585 ccw(c102.428,4.954) 102.428,4.432 ccw(c102.428,3.911) 102.06,4.28 cw(c102.509,3.83) 102.509,4.466 ; v1@102.348,68.787 ccw(c102.897,69.065) 102.737,68.471 ; v1@102.355,68.777 ccw(c103.075,69.497) C58.2@103.075,68.479 ; v1(102.382,68.804) 102.707,68.479 ; v1@102.535,68.957 ccw(c103.688,70.11) C58.2@103.688,68.479 ; C69.2@102.595,84.106 cw(c101.897,83.398) 102.891,83.398 ; 102.891,83.892 cw(c103.195,83.892) C69.2@102.98,84.107 ; 102.995,99.436 cw(c102.995,98.92) R30.5@103.36,99.285 ; 103.049,99.436 ccw(c103.049,99.876) R30.5@103.36,99.565 ; C58.2@103.058,68.26 ccw(c102.707,68.089) 102.707,68.479 ; C58.2@103.058,68.698 cw(c102.707,68.869) 102.707,68.479 ; R30.5@103.64,99.285 cw(c103.978,98.947) 103.978,99.425 cw(c103.978,99.903) R30.5@103.64,99.565 ; R30.6@104.288,99.338 ccw(c104.078,99.128) 104.078,99.425 ccw(c104.078,99.722) R30.6@104.288,99.512 ; C58.2@104.307,68.127 cw(c105.157,67.277) 105.157,68.479 cw(c105.157,69.681) C58.2@104.307,68.831 ; v1@104.399,84.386 cw(c103.834,83.821) 104.633,83.821 ; R30.6@104.462,99.338 cw(c104.672,99.128) 104.672,99.425 cw(c104.672,99.722) R30.6@104.462,99.512 ; v1(104.552,84.539) 104.633,84.458 104.633,83.058 104.999,82.692 ; R30.7@105.088,99.338 ccw(c104.878,99.128) 104.878,99.425 ccw(c104.878,99.722) R30.7@105.088,99.512 ; R30.7@105.262,99.338 cw(c105.472,99.128) 105.472,99.425 cw(c105.472,99.722) R30.7@105.262,99.512 ; C66.2@105.342,82.476 ccw(c104.999,82.311) 104.999,82.692 ; C66.2@105.342,82.908 cw(c104.999,83.073) 104.999,82.692 ; R30.8@105.91,99.285 ccw(c105.572,98.947) 105.572,99.425 ccw(c105.572,99.903) R30.8@105.91,99.565 ; R30.8@106.19,99.285 cw(c106.494,98.981) 106.494,99.411 ; R30.8@106.19,99.565 ccw(c106.562,99.937) 106.562,99.411 ; C66.2@106.616,82.365 cw(c107.336,81.738) 107.336,82.692 ; C66.2@106.616,83.019 ccw(c107.336,83.646) 107.336,82.692 ; 106.817,144.953 107.082,144.688 REG4.2@110.089,144.688 REG4.2@110.089,144.674 ; C68.2@107.725,68.127 ccw(c106.875,67.277) 106.875,68.479 ccw(c106.875,69.681) C68.2@107.725,68.831 ; C57.2@108.085,82.379 ccw(c107.353,81.732) 107.353,82.709 ; C57.2@108.085,83.039 cw(c107.353,83.686) 107.353,82.709 ; C68.2@108.902,68.152 cw(c109.622,67.525) 109.622,68.479 ; C68.2@108.902,68.806 ccw(c109.622,69.433) 109.622,68.479 ; C57.2@109.26,82.357 cw(c110.11,81.507) 110.11,82.709 cw(c110.11,83.911) C57.2@109.26,83.061 ; X3.2@110.055,73.556 ccw(c109.997,73.757) 110.206,73.757 ; X3.2@110.232,72.684 cw(c109.339,71.791) 110.602,71.791 cw(c111.865,71.791) X3.2@110.972,72.684 ; X3.2@110.356,73.554 cw(c110.419,73.757) 110.206,73.757 ; C70.2@110.375,68.145 ccw(c109.622,67.464) 109.622,68.479 ; C70.2@110.375,68.813 cw(c109.622,69.494) 109.622,68.479 ; v1@110.815,70.136 ccw(c110.444,70.507) 110.969,70.507 ; 110.86,69.274 ccw(c110.096,69.479) 110.781,69.875 cw(c110.097,69.48) 110.86,69.275 ; JEPC.2@110.956,10.274 ccw(c109.452,10.274) 110.515,11.338 ccw(c111.579,12.401) JEPC.2@111.579,10.897 ; v1@110.968,69.679 cw(c109.769,69.679) 110.617,68.831 ccw(c109.767,69.681) 110.969,69.681 ccw(c112.171,69.681) 111.321,68.831 cw(c112.174,69.684) v1@110.968,69.684 ; v1(110.968,69.983) C70.2@110.969,68.479 109.622,68.479 ; 110.969,69.459 ccw(c110.444,69.459) 110.815,69.83 cw(c110.447,69.461) 110.968,69.461 cw(c111.489,69.461) 111.121,69.83 ccw(c111.487,69.464) 110.969,69.464 ; 110.969,70.502 ccw(c111.487,70.502) v1@111.121,70.136 ; 110.98,69.64 ccw(c110.732,69.573) 110.86,69.796 cw(c110.731,69.572) 110.98,69.639 ; 111.077,69.278 cw(c111.836,69.482) 111.155,69.875 ccw(c111.835,69.482) 111.077,69.279 ; BB.2@111.138,3.992 ccw(c110.075,2.928) 110.075,4.432 ccw(c110.075,5.936) BB.2@111.138,4.873 ; JEPC.2@111.138,9.834 ccw(c110.075,8.77) 110.075,10.274 ccw(c110.075,11.778) JEPC.2@111.138,10.715 ; JEPC.2@111.21,10.274 ccw(c110.319,10.274) 110.949,10.904 ccw(c111.579,11.534) JEPC.2@111.579,10.643 ; BB.2@111.318,4.172 ccw(c110.688,3.542) 110.688,4.432 ccw(c110.688,5.323) BB.2@111.318,4.693 ; JEPC.2@111.318,10.014 ccw(c110.688,9.384) 110.688,10.274 ccw(c110.688,11.165) JEPC.2@111.318,10.535 ; C70.2@111.569,68.152 cw(c112.289,67.525) 112.289,68.479 ; C70.2@111.569,68.806 ccw(c112.289,69.433) 112.289,68.479 ; C76.2@112.043,82.357 ccw(c111.193,81.507) 111.193,82.709 ccw(c111.193,83.911) C76.2@112.043,83.061 ; BB.2@112.156,4.199 cw(c112.503,4.058) 112.503,4.432 ; BB.2@112.156,4.666 ccw(c112.503,4.807) 112.503,4.432 ; C72.2@113.042,68.145 ccw(c112.289,67.464) 112.289,68.479 ; C72.2@113.042,68.813 cw(c112.289,69.494) 112.289,68.479 ; C76.2@113.204,82.363 cw(c114.016,81.581) v1(114.016,82.709) ; C76.2@113.204,83.054 ccw(c114.016,83.837) v1(114.016,82.709) ; 113.494,82.709 ccw(c113.494,83.231) v1@113.863,82.862 ; 113.495,82.709 cw(c113.495,82.188) v1@113.863,82.556 ; 113.512,82.844 ccw(c113.647,83.348) v1@113.908,82.896 ; 113.513,82.844 cw(c113.378,82.34) v1@113.829,82.601 ; v1@113.829,82.817 cw(c113.377,83.078) 113.512,82.574 cw(c113.647,82.07) v1@113.908,82.522 ; 114.068,18.542 cw(c114.068,18.005) v1@114.447,18.385 ; 114.09,18.542 ccw(c114.09,19.048) v1@114.447,18.69 ; v1@114.124,82.522 cw(c114.385,82.07) 114.52,82.574 cw(c114.655,83.078) v1@114.203,82.817 ; v1@114.124,82.896 ccw(c114.385,83.348) 114.52,82.844 ccw(c114.655,82.34) v1@114.203,82.601 ; v1@114.169,82.556 cw(c114.538,82.188) 114.538,82.709 cw(c114.538,83.23) v1@114.169,82.862 ; C72.2@114.238,68.153 cw(c114.95,67.536) 114.95,68.479 ; C72.2@114.238,68.805 ccw(c114.95,69.422) 114.95,68.479 ; v1@114.6,18.321 cw(c114.6,17.8) 114.969,18.169 cw(c115.338,18.537) v1@114.816,18.537 ; v1@114.656,18.329 cw(c114.738,18.022) 114.897,18.297 ; v1@114.763,18.375 ccw(c115.319,18.93) IC8.4@115.319,18.144 ; v1@114.809,18.593 ccw(c115.505,18.778) IC8.4@115.145,18.154 ; C61.2@114.831,82.363 ccw(c114.016,81.577) v1(114.016,82.709) ; C61.2@114.831,83.055 cw(c114.016,83.841) v1(114.016,82.709) ; C62.2@115.033,80.581 ccw(c114.742,80.822) 115.009,81.089 ; C67.2@115.065,70.826 cw(c114.765,70.526) 115.189,70.526 ; C67.2@115.065,71.98 ccw(c114.215,72.83) 115.417,72.83 ccw(c116.619,72.83) C67.2@115.769,71.98 ; C59.2@115.065,73.493 cw(c114.215,72.643) 115.417,72.643 cw(c116.619,72.643) C59.2@115.769,73.493 ; C59.2@115.065,74.647 ccw(c114.215,75.497) 115.417,75.497 ccw(c116.619,75.497) C59.2@115.769,74.647 ; C60.2@115.065,76.16 cw(c114.215,75.31) 115.417,75.31 cw(c116.619,75.31) C60.2@115.769,76.16 ; C60.2@115.068,77.318 ccw(c114.256,78.147) v1@115.417,78.147 ; 115.189,70.335 cw(c115.544,70.335) C67.2@115.491,70.685 ; 115.206,80.891 cw(c114.958,80.643) C62.2@115.229,80.419 ; v1@115.251,78.018 cw(c114.877,77.802) 115.294,77.69 ; C60.2@115.262,77.568 cw(c115.852,77.41) v1@115.546,77.939 ; v1@115.286,77.973 cw(c114.969,77.656) 115.417,77.656 ; v1@115.33,77.939 cw(c115.096,77.532) 115.549,77.654 ; C60.2@115.417,77.553 cw(c116.012,77.553) v1@115.591,77.973 ; v1(115.438,78.126) v1@115.417,78.147 ; 115.566,77.592 cw(c116.098,77.734) v1@115.624,78.016 ; IC8.4@115.589,18.021 115.116,18.021 v1(114.6,18.537) 114.596,18.542 103.866,18.542 103.48,18.156 99.815,18.156 97.555,15.896 ; C74.2@115.709,68.145 ccw(c114.956,67.464) 114.956,68.479 ; C74.2@115.709,68.813 cw(c114.956,69.494) 114.956,68.479 ; C60.2@115.766,77.318 cw(c116.578,78.147) v1@115.417,78.147 ; C74.2@116.959,68.229 cw(c117.393,67.977) 117.393,68.479 ; C74.2@116.959,68.729 ccw(c117.393,68.981) 117.393,68.479 ; v1@117.491,63.03 cw(c117.491,62.509) 117.86,62.877 cw(c118.229,63.246) v1@117.707,63.246 ; v1(117.491,63.246) 120.074,60.664 125.208,60.664 ; BB.10@121.116,4.432 cw(c119.612,4.432) 120.675,3.369 cw(c121.739,2.305) BB.10@121.739,3.809 ; JEPC.10@121.32,10.736 ccw(c120.464,11.68) 121.739,11.68 ; BB.10@121.37,4.432 cw(c120.479,4.432) 121.109,3.803 cw(c121.739,3.173) BB.10@121.739,4.063 ; JEPC.10@121.491,10.548 ccw(c120.984,11.107) 121.739,11.107 ccw(c122.494,11.107) JEPC.10@121.986,10.548 ; BB.10@121.739,4.432 120.276,2.969 113.966,2.969 112.503,4.432 ; JEPC.10@122.157,10.736 cw(c123.013,11.68) 121.739,11.68 ; v1@122.919,13.076 cw(c122.397,13.076) 122.766,12.708 cw(c123.135,12.339) v1@123.135,12.86 ; v1(123.135,13.076) 121.739,11.68 ; REG2.2@123.317,133.477 REG2.2@123.317,134.366 123.391,134.44 REG2.2@123.391,134.588 ; REG2.2@123.317,144.674 REG2.2@123.317,144.704 REG2.2@125.243,144.704 ; 123.698,129.132 123.731,129.165 ; v1@130.657,18.897 cw(c130.289,18.529) 130.81,18.529 cw(c131.331,18.529) v1@130.963,18.897 ; v1(130.81,19.05) 130.81,17.093 131.644,16.259 v1(133.096,16.259) v1@133.414,16.259 ; v1@132.943,16.106 ccw(c132.575,15.738) 132.575,16.259 ccw(c132.575,16.78) v1@132.943,16.412 ; v1@133.217,16.08 cw(c133.588,15.528) 133.76,16.17 ; v1@133.217,16.438 ccw(c133.588,16.99) 133.76,16.348 ; v1@133.249,16.106 cw(c133.617,15.738) 133.617,16.259 cw(c133.617,16.78) v1@133.249,16.412 ; C3.2@133.862,43.803 cw(c133.396,43.337) 134.055,43.337 cw(c134.714,43.337) C3.2@134.248,43.803 ; C3.2@133.862,44.589 ccw(c133.396,45.055) 134.055,45.055 ccw(c134.714,45.055) C3.2@134.248,44.589 ; C4.2@134.047,41.363 cw(c133.197,40.513) 134.399,40.513 cw(c135.601,40.513) C4.2@134.751,41.363 ; C2.1@134.146,15.932 ccw(c133.429,15.309) v1@133.429,16.259 ; C2.1@134.146,16.586 cw(c133.429,17.209) v1@133.429,16.259 ; C4.2@134.217,42.628 ccw(c134.112,42.896) 134.399,42.896 ; v1@134.246,40.141 ccw(c133.878,40.51) 134.399,40.51 ccw(c134.92,40.51) v1@134.552,40.141 ; v1(134.399,39.988) C4.2@134.399,41.94 134.399,42.896 ; C4.2@134.581,42.628 cw(c134.686,42.896) 134.399,42.896 ; C2.1@134.967,16.523 cw(c134.985,15.599) 135.638,16.253 ; C2.1@134.972,16.269 cw(c135,14.771) 136.06,15.83 ; C2.1@134.977,16.015 cw(c135.016,13.942) 136.482,15.408 ; C2.1@134.982,15.761 cw(c135.032,13.114) 136.904,14.986 ; 135.039,51.634 ccw(c135.039,52.675) 135.775,51.939 ccw(c135.407,52.307) 135.928,52.307 ccw(c136.449,52.307) 136.081,51.939 ccw(c136.817,52.675) 136.817,51.634 ; C2.1@135.451,16.123 cw(c135.631,16.072) 135.631,16.259 ; C2.1@135.451,16.395 ccw(c135.631,16.447) 135.631,16.259 ; C7.2@137.192,10.57 ccw(c136.342,9.72) 136.342,10.922 ccw(c136.342,12.124) C7.2@137.192,11.274 ; C7.2@137.453,11.637 ccw(c137.35,12.193) 137.816,11.873 ; C7.2@137.711,11.719 ccw(c136.093,13.337) R3.2@138.381,13.337 ; C7.2@137.773,11.23 cw(c138.51,11.498) 137.864,11.942 ; C7.2@138.012,11.317 cw(c139.08,11.706) 138.143,12.349 ; 138.145,12.153 ccw(c136.96,13.337) R3.2@138.635,13.337 ; R3.2@138.54,13.905 ccw(c138.182,14.383) 138.779,14.383 ; 138.578,12.587 ccw(c137.828,13.337) R3.2@138.889,13.337 ; R3.2@138.655,12.959 cw(c138.599,12.787) 138.779,12.787 ; R3.2@138.903,12.959 ccw(c138.959,12.787) 138.779,12.787 ; 139.002,100.94 ccw(c139.002,101.705) v1@139.543,101.164 ; R3.2@139.018,13.905 cw(c139.376,14.383) 138.779,14.383 ; 139.346,100.94 cw(c139.346,100.662) v1@139.543,100.858 ; v1@140.041,49.667 cw(c140.418,49.506) 140.418,49.916 ; v1(140.076,49.652) 140.34,49.916 140.802,49.916 ; v1@140.275,49.567 cw(c140.802,49.342) 140.802,49.916 ; 140.54,50.673 cw(c140.54,49.471) C5.1@141.449,50.257 ; C5.1@141.018,50.131 ccw(c140.733,50.416) C5.1@141.136,50.416 ; C5.1@141.033,50.147 cw(c141.31,49.87) C5.1@141.509,50.206 ; C5.1@141.052,50.673 ccw(c141.052,50.998) C5.1@141.282,50.768 ; C5.1@141.257,50.091 ccw(c139.985,48.992) 139.985,50.673 ; C5.1@141.303,50.416 140.802,49.916 ; C5.1@141.38,49.988 ccw(c141.138,49.581) 140.802,49.916 ; C5.1@141.859,50.416 141.602,50.673 139.985,50.673 ; Header7.5@142.794,106.599 Header7.5@142.875,106.68 ; 143.48,124.386 143.487,124.379 ; 1.754,121.388 1.754,115.432 4.237,112.949 7.717,112.949 9.343,114.575 ; 7.266,49.373 ccw(c7.476,49.373) 7.385,49.184 cw(c7.476,49.373) 7.266,49.373 ; 7.266,49.373 cw(c7.056,49.373) 7.147,49.184 ccw(c7.056,49.373) 7.266,49.373 ; 7.266,49.373 8.095,50.202 9.342,50.202 ; 9.343,114.575 9.343,115.489 10.257,116.404 ; 10.257,116.404 16.311,116.404 Debug5.1@17.399,115.316 19.706,117.623 26.173,117.623 30.462,121.912 ; C17.2@30.453,98.014 30.462,106.786 ; C17.2@30.453,98.014 30.453,106.777 30.462,106.786 ; 30.462,106.786 30.462,121.912 ; 30.462,121.912 Module4.10@30.462,123.267 32.101,123.267 34.4,125.566 34.4,128.16 C18.2@33.428,129.132 ; 41.785,80.844 C31.2@42.543,81.602 ; C31.2@42.543,81.602 C31.2@42.543,82.296 ; C31.2@42.543,82.296 42.543,86.454 40.381,88.616 40.381,91.732 41.544,92.895 61.907,92.895 Debug4.1@67.183,98.171 ; C31.2@42.543,82.296 v1@43.734,82.296 ; 43.607,74.168 43.858,74.419 ; v1@43.734,82.296 v1@43.985,82.045 ; 43.858,74.419 C27.2@45.086,74.419 45.982,74.419 ; v1@43.985,82.045 C28.2@45.213,82.045 C26.2@51.182,82.045 51.182,80.891 ; 45.982,74.419 45.982,77.008 ; 47.248,62.556 47.629,62.937 ; 48.006,30.191 49.373,28.824 62.479,28.824 63.216,29.561 ; 50.042,78.389 50.042,79.751 51.182,80.891 ; Debug4.1@67.183,98.171 83.385,98.171 v1@85.09,96.466 ; R4.5@71.252,4.948 81.711,4.948 v1(82.478,5.715) 83.081,6.318 100.108,6.318 101.727,4.699 v1@101.727,4.466 ; R4.5@71.252,4.948 71.735,4.466 ; 71.735,4.466 v1@101.727,4.466 ; 83.847,131.898 C11.2@83.847,132.558 83.847,133.98 84.422,134.555 C9.1@84.422,135.987 88.456,131.953 94.488,131.953 96.018,133.483 ; 83.847,131.898 84.38,131.364 ; v1@85.09,96.466 85.152,96.401 v1@85.207,96.342 ; v1@85.09,96.466 v1(85.09,96.342) v1@85.207,96.342 ; v1@85.207,96.342 85.536,96.342 ; 85.536,96.342 86.058,96.864 ; R5.7@97.555,14.843 97.555,15.896 ; 97.555,15.896 105.957,15.896 JEPC.2@111.579,10.274 109.208,10.274 103.399,4.466 v1@101.727,4.466 ; 100.704,84.3 ccw(c100.704,84.053) 100.487,84.17 cw(c100.704,84.053) 100.704,84.3 ; 100.704,84.3 cw(c100.704,84.547) 100.487,84.43 ccw(c100.704,84.547) 100.704,84.3 ; 100.704,84.3 C69.2@102.587,84.3 102.891,84.3 102.891,83.404 103.564,82.731 103.564,80.869 102.776,80.081 102.776,72.893 103.361,72.309 103.729,72.309 104.618,73.198 104.618,73.757 104.897,74.036 109.927,74.036 110.206,73.757 ; 101.187,68.121 C71.2@101.187,69.117 ; C71.2@101.187,69.117 101.187,70.684 C65.2@101.187,72.292 C75.2@101.187,74.959 101.187,75.925 ; C71.2@101.187,69.117 101.825,68.479 ; 101.187,75.925 cw(c100.885,75.925) 100.999,75.645 ccw(c100.885,75.925) 101.187,75.925 ; 101.825,68.479 102.707,68.479 ; 102.707,68.479 C58.2@103.73,68.479 106.015,68.479 C68.2@108.302,68.479 109.622,68.479 ; 104.999,82.692 C66.2@106.016,82.692 107.336,82.692 ; 107.336,82.692 107.353,82.709 ; 107.353,82.709 C57.2@108.683,82.709 110.638,82.709 C76.2@112.62,82.709 v1(114.016,82.709) ; 110.206,73.757 110.206,73.054 X3.2@110.602,73.054 110.602,70.949 110.969,70.582 C70.2@110.969,68.479 112.289,68.479 ; 112.289,68.479 C72.2@113.636,68.479 114.95,68.479 ; v1(114.016,82.709) C61.2@115.414,82.709 115.414,82.148 115.395,82.129 115.009,82.129 115.009,81.089 ; 114.95,68.479 114.956,68.479 ; 114.95,68.479 114.95,69.208 114.681,69.477 114.681,69.858 115.189,70.366 115.189,71.403 C67.2@115.417,71.403 C59.2@115.417,74.07 C60.2@115.417,76.737 v1@115.417,78.147 ; 114.95,68.479 114.956,68.479 ; 114.956,68.479 C74.2@116.303,68.479 117.393,68.479 ; 115.009,81.089 115.417,80.681 C62.2@115.417,80.039 ; v1@115.417,78.147 v1@115.417,78.38 ; v1@115.417,78.38 C62.2@115.417,80.039 ; v1@115.417,78.38 C62.2@115.417,80.039 ; 115.417,78.612 ccw(c114.215,78.612) 115.065,79.462 cw(c114.215,78.612) 115.417,78.612 ; 115.417,78.612 cw(c116.619,78.612) 115.769,79.462 ccw(c116.619,78.612) 115.417,78.612 ; 117.393,68.479 125.208,60.664 ; 121.739,11.68 JEPC.10@121.739,10.274 122.386,10.922 C7.2@137.544,10.922 137.544,11.552 138.779,12.787 ; 125.208,60.664 130.979,60.664 135.928,55.715 v1(135.928,51.786) v1@136.08,51.634 ; v1@133.414,16.259 133.422,16.251 v1@133.429,16.259 ; v1@133.414,16.259 v1@133.429,16.259 ; v1@133.429,16.259 C2.1@134.747,16.259 135.631,16.259 ; 134.399,42.896 134.055,43.24 C3.2@134.055,44.196 134.055,48.376 133.453,48.978 133.453,50.979 134.108,51.634 v1@136.08,51.634 ; 135.631,16.259 136.904,14.986 ; v1@136.08,51.634 139.024,51.634 139.985,50.673 ; 136.904,14.986 138.176,14.986 138.779,14.383 ; 138.779,12.787 R3.2@138.779,13.462 138.779,14.383 ; v1@115.286,78.279 ccw(c114.969,78.596) 115.417,78.596 cw(c114.969,78.595) v1@115.286,78.279 ; 115.417,78.699 ccw(c116.012,78.699) 115.591,78.279 cw(c116.012,78.699) 115.417,78.699